# Altium PCB COMS.PcbDoc
Units mm, origin at the board's own origin, x right, y up, seen from the top; angles counter-clockwise.
Board outline 75 x 57.5 mm, 2 copper layers (Top Layer, Bottom Layer); 50 components, 32 nets, 157 pads, 41 vias.
Unrouted connection lines stored in the file: 1.
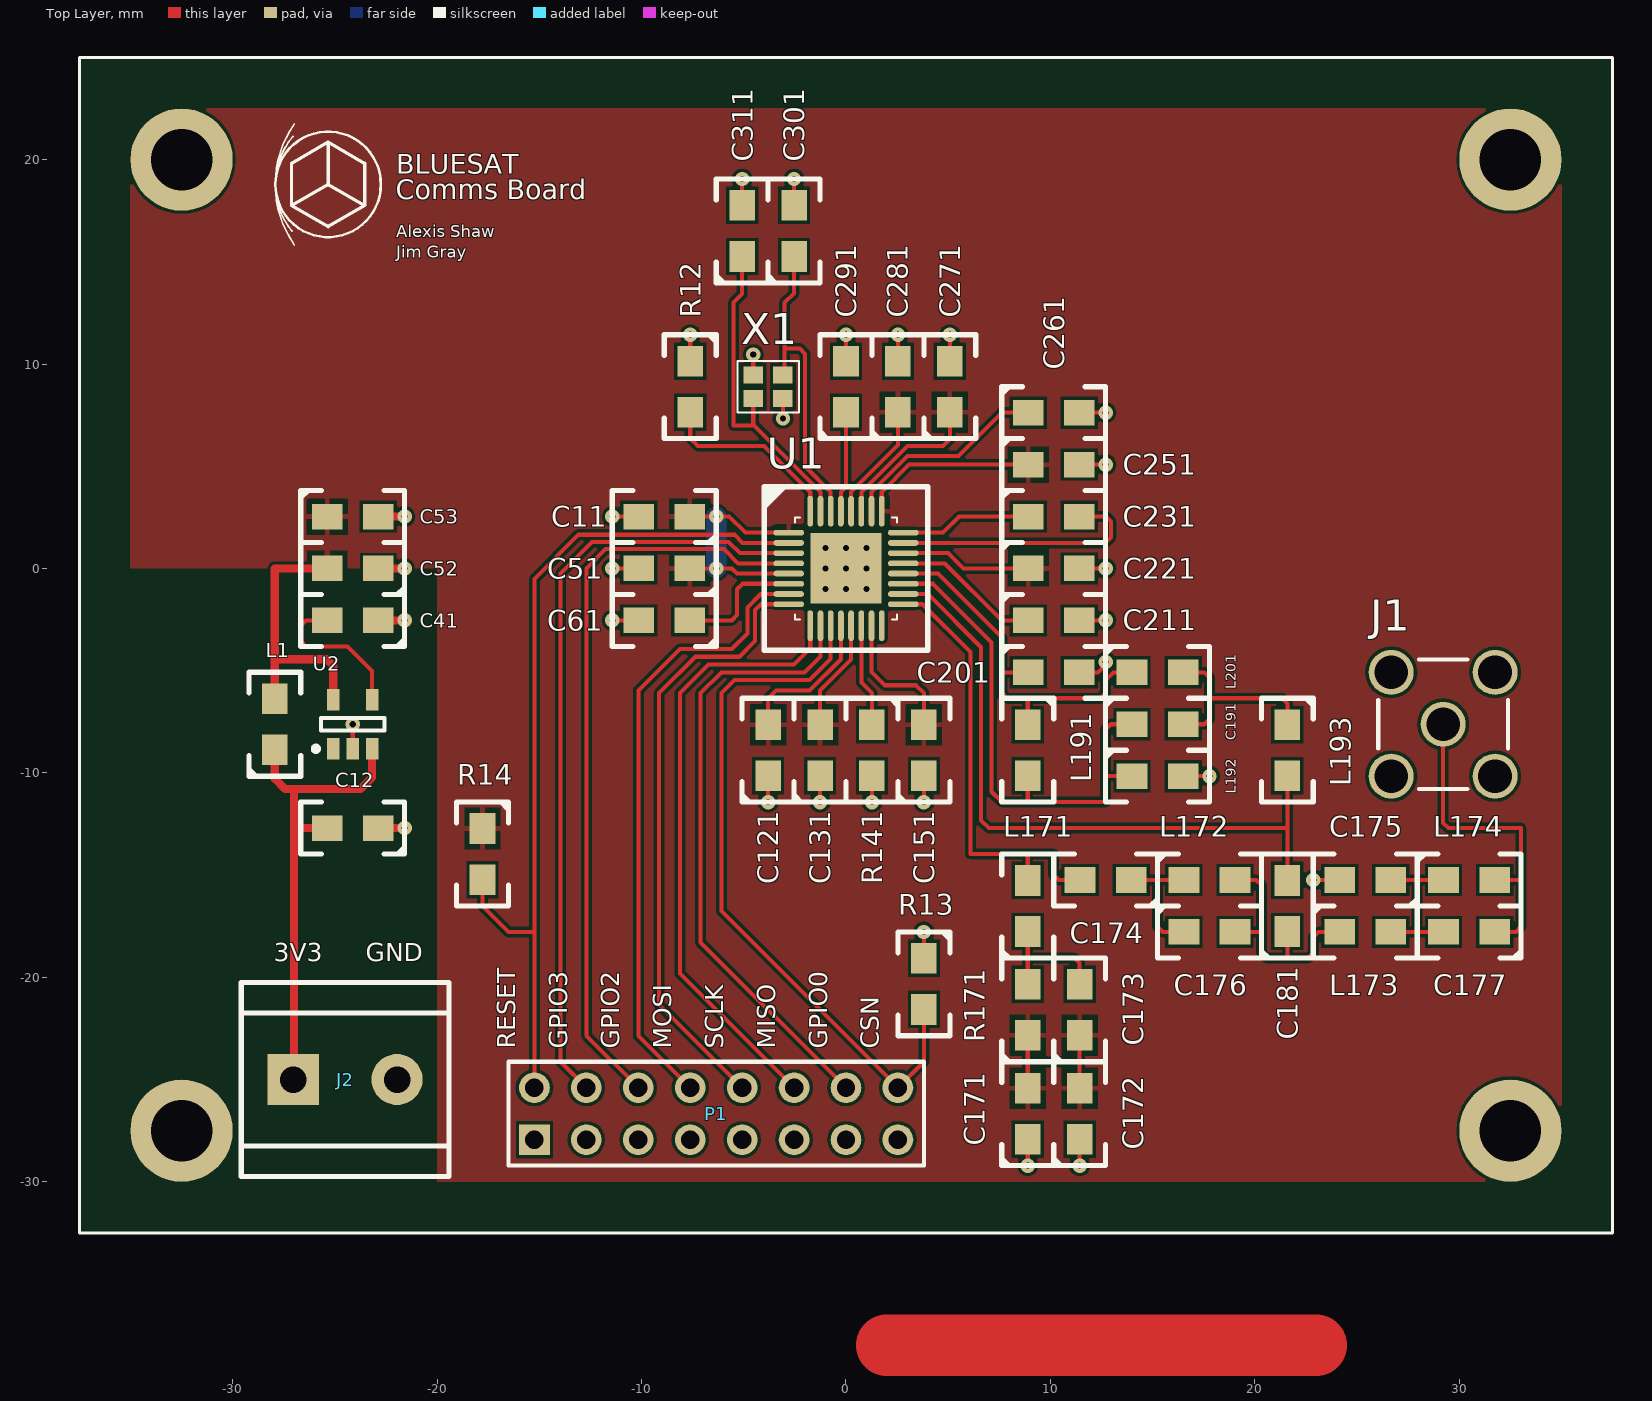
[diagram p0: Top Layer view]
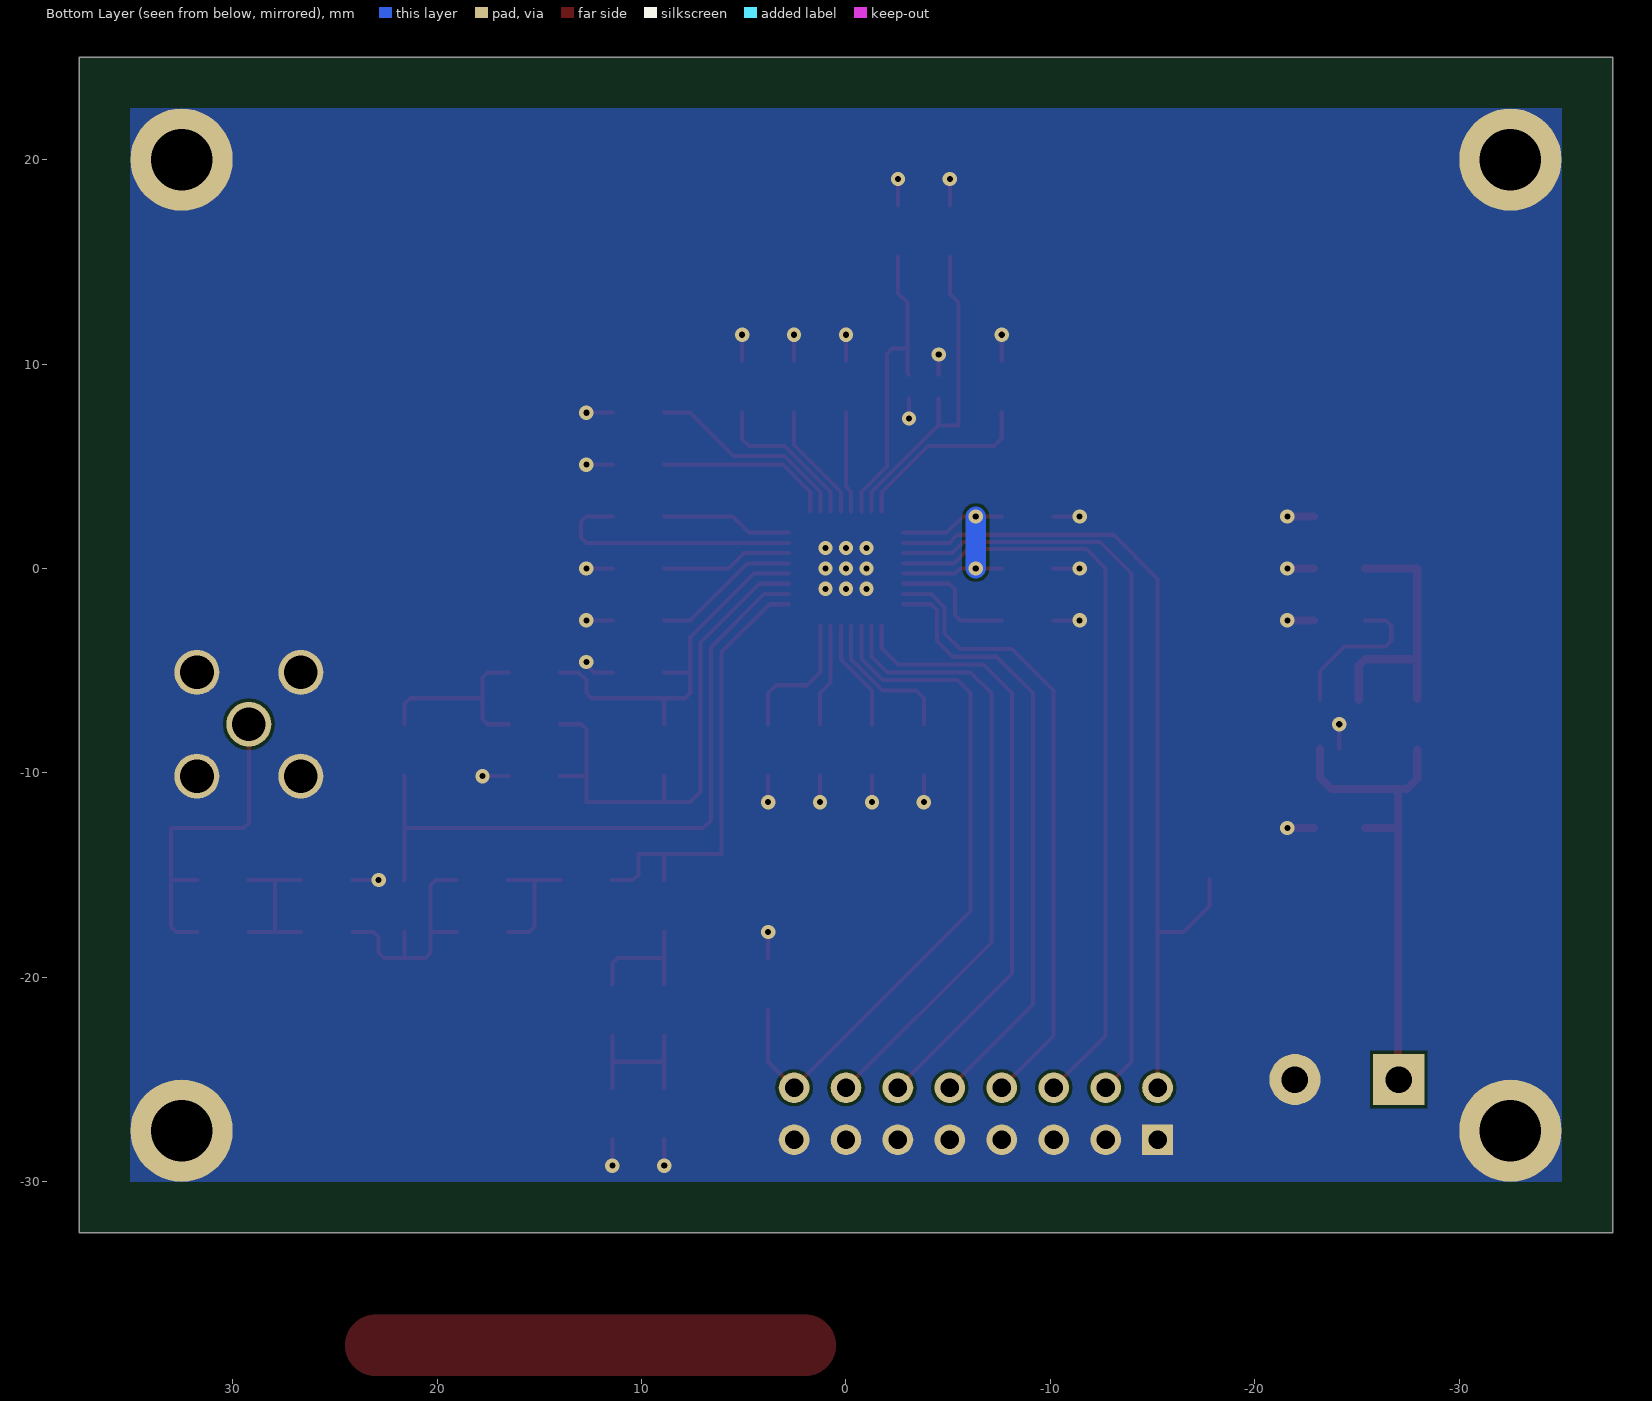
[diagram p1: Bottom Layer view, seen from below]

## Layer stack, top to bottom
Top Solder: solder mask 0.0102, Solder Resist, Dk 3.5
Top Layer: signal copper 0.0356
Dielectric 1: dielectric 0.32, FR-4, Dk 4.8
Bottom Layer: signal copper 0.0356
Bottom Solder: solder mask 0.0102, Solder Resist, Dk 3.5

## Board outline
-37.5,-32.5 -37.5,25 37.5,25 37.5,-32.5

## Design rules (kind name [scope] priority, off if disabled: settings)
Clearance Clearance_1 [All] p1: gap=0.152
Clearance [(IsRegion AND InNet('VDD_REG')) vs InNet('GND')] p2: gap=0.4
PolygonConnect PolygonConnect_1 [InNet('GND') vs InNet('GND')] p1: connectstyle=Direct reliefconductorwidth=0.254 reliefentries=4 polygonreliefangle="90 Angle" airgapwidth=0.254
PolygonConnect [All] p2: connectstyle=Relief reliefconductorwidth=0.254 reliefentries=4 polygonreliefangle="90 Angle" airgapwidth=0.254
RoutingVias [All] p1: holewidth=0.711 width=1.27 viastyle="Through Hole" minholewidth=0.3 minwidth=0.7 maxholewidth=0.711 maxwidth=1.27
SolderMaskExpansion [All] p1: expansion=0.05
UnpouredPolygon [All] p1: allowunpoured=FALSE
Width [All] p1: maxlimit=3 minlimit=0.152 preferedwidth=0.254
29 further rules are at their usual default settings.

## Components (designator, comment, footprint, x,y, rotation, side; value= is the part's Value field where it differs from the comment)
C11 "0805 Cap" "0805 Cap" -8.89,2.54 r0 top
C12 "0805 Cap" "0805 Cap" -24.13,-12.7 r0 top
C41 "0805 Cap" "0805 Cap" -24.13,-2.54 r0 top
C51 "0805 Cap" "0805 Cap" -8.89,0 r0 top
C52 "0805 Cap" "0805 Cap" -24.13,0 r0 top
C53 "DNM" "0805 Cap" -24.13,2.54 r180 top
C61 "0805 Cap" "0805 Cap" -8.89,-2.54 r0 top
C121 "0805 Cap" "0805 Cap" -3.81,-8.89 r270 top
C131 "0805 Cap" "0805 Cap" -1.27,-8.89 r270 top
C151 "0805 Cap" "0805 Cap" 3.81,-8.89 r270 top
C171 "0805 Cap" "0805 Cap" 8.89,-26.67 r270 top
C172 "DNM" "0805 Cap" 11.43,-26.67 r270 top
C173 "DNM" "0805 Cap" 11.43,-21.59 r270 top
C174 "0805 Cap" "0805 Cap" 12.7,-15.24 r0 top
C175 "0805 Cap" "0805 Cap" 25.4,-15.24 r0 top
C176 "0805 Cap" "0805 Cap" 17.78,-17.78 r180 top
C177 "DNM" "0805 Cap" 30.48,-17.78 r0 top
C181 "0805 Cap" "0805 Cap" 21.59,-16.51 r270 top
C191 "0805 Cap" "0805 Cap" 15.24,-7.62 r180 top
C201 "0805 Cap" "0805 Cap" 10.16,-5.08 r180 top
C211 "0805 Cap" "0805 Cap" 10.16,-2.54 r180 top
C221 "0805 Cap" "0805 Cap" 10.16,0 r180 top
C231 "0805 Cap" "0805 Cap" 10.16,2.54 r180 top
C251 "0805 Cap" "0805 Cap" 10.16,5.08 r180 top
C261 "0805 Cap" "0805 Cap" 10.16,7.62 r180 top
C271 "0805 Cap" "0805 Cap" 5.08,8.89 r270 top
C281 "0805 Cap" "0805 Cap" 2.54,8.89 r270 top
C291 "0805 Cap" "0805 Cap" 0,8.89 r270 top
C301 "0805 Cap" "0805 Cap" -2.54,16.51 r270 top
C311 "0805 Cap" "0805 Cap" -5.08,16.51 r270 top
J1 "32K101-400L5" ROS-32K101-400L5_V 29.21,-7.62 r0 top
J2 "2 Pin terminal Block" "5.05mm Terminal Block - 2" -24.5,-25 r0 top
L1 "" "0805 Resistor" -27.94,-7.62 r270 top
L171 "Inductor" "0805 Resistor" 8.89,-16.51 r270 top
L172 "Inductor" "0805 Resistor" 17.78,-15.24 r180 top
L173 "Inductor" "0805 Resistor" 25.4,-17.78 r180 top
L174 "Inductor" "0805 Resistor" 30.48,-15.24 r180 top
L191 "Inductor" "0805 Resistor" 8.89,-8.89 r90 top
L192 "Inductor" "0805 Resistor" 15.24,-10.16 r180 top
L193 "Inductor" "0805 Resistor" 21.59,-8.89 r90 top
L201 "Inductor" "0805 Resistor" 15.24,-5.08 r180 top
P1 "Header 8X2A" HDR2X8_CEN -15.24,-27.94 r0 top
R12 "0805 Resistor" "0805 Resistor" -7.62,8.89 r90 top
R13 "0805 Resistor" "0805 Resistor" 3.81,-20.32 r90 top
R14 "0805 Resistor" "0805 Resistor" -17.78,-13.97 r90 top
R141 "0805 Resistor" "0805 Resistor" 1.27,-8.89 r90 top
R171 "0805 Resistor" "0805 Resistor" 8.89,-21.59 r270 top
U1 "CC1120" TI-RHB 0,0 r90 top
U2 "TPS79930DDCT" TI-DDC5_N -24.13,-7.62 r90 top
X1 "FA128 30MHz" FA128 -3.81,8.89 r0 top

## Footprints (in the part's own frame and the unit in brackets; to place one, negate y for a bottom-side part, rotate by r counter-clockwise, add the part's x,y. Pads: shape width x height; smd on the part's side, far side on the other; paste and mask are expansions set on the pad)
"5.05mm Terminal Block - 2" [mm]
  rect 2.5x2.5 hole 1.3: 1(-2.54,0)
  round 2.5 hole 1.3: 2(2.54,0)
  silkscreen extent -5.08,-4.75 5.08,4.75
"0805 Cap" [mm]
  rect 1.5x1.25 smd: 1(1.25,0) 2(-1.25,0)
  silkscreen extent -2.54,-1.27 2.54,1.27, body extent -1,-0.63 1.1,0.63, height 0.9
"0805 Resistor" [mm] "0805 Resistor"
  rect 1.5x1.25 smd: 1(1.25,0) 2(-1.25,0)
  silkscreen extent -2.54,-1.27 2.54,1.27, body extent -1,-0.63 1.1,0.63, height 0.6
FA128 [mm]
  rect 0.95x0.85 smd mask+0.07: 1(-0.725,-0.575) 2(0.725,-0.575) 3(0.725,0.575) 4(-0.725,0.575)
  silkscreen extent -1.5,-1.25 1.5,1.25, body extent -1,-0.8 1,0.8, height 0.5
HDR2X8_CEN [mm] "Connector; Header; 8x2 Position"
  rect 1.5x1.5 hole 0.9: 1(0,0)
  round 1.5 hole 0.9: 2(2.54,0) 3(5.08,0) 4(7.62,0) 5(10.16,0) 6(12.7,0) 7(15.24,0) 8(17.78,0) 9(0,2.54) 10(2.54,2.54) 11(5.08,2.54) 12(7.62,2.54) 13(10.16,2.54) 14(12.7,2.54) 15(15.24,2.54) 16(17.78,2.54)
  silkscreen extent -1.27,-1.27 19.05,3.81
ROS-32K101-400L5_V [mm] "SMA Straight Jack, 6.35x6.35x9.5mm, Rosenberger Recommended"
  round 2.2 hole 1.65: 1(0,0) MH(-2.54,-2.54) MH(-2.54,2.54) MH(2.54,-2.54) MH(2.54,2.54)
  silkscreen extent -3.17,-3.18 3.18,3.17, body extent -3.17,-3.17 3.18,3.18, height 9.5
TI-DDC5_N [mm] "SOT23, 5-Leads, Body 2.9x1.6mm, Pitch 0.95mm, IPC Medium Density"
  rect 1.05x0.6 smd: 1(-1.2,0.95) 2(-1.2,0) 3(-1.2,-0.95) 4(1.2,-0.95) 5(1.2,0.95)
  silkscreen extent -1.32,-1.55 0.3,1.92, body extent -0.87,-1.52 0.87,1.53, height 1.1
TI-RHB [mm] "S_PVQFN-N32"
  rect 3.45x3.45 smd: 0(0,0)
  oval 0.28x1.5 smd mask+0.07: 1(1.75,2.8) 2(1.25,2.8) 3(0.75,2.8) 4(0.25,2.8) 5(-0.25,2.8) 6(-0.75,2.8) 7(-1.25,2.8) 8(-1.75,2.8) 17(-1.75,-2.8) 18(-1.25,-2.8) 19(-0.75,-2.8) 20(-0.25,-2.8) 21(0.25,-2.8) 22(0.75,-2.8) 23(1.25,-2.8) 24(1.75,-2.8)
  oval 1.5x0.28 smd mask+0.07: 9(-2.8,1.75) 10(-2.8,1.25) 11(-2.8,0.75) 12(-2.8,0.25) 13(-2.8,-0.25) 14(-2.8,-0.75) 15(-2.8,-1.25) 16(-2.8,-1.75) 25(2.8,-1.75) 26(2.8,-1.25) 27(2.8,-0.75) 28(2.8,-0.25) 29(2.8,0.25) 30(2.8,0.75) 31(2.8,1.25) 32(2.8,1.75)
  silkscreen extent -4,-4 4,4, body extent -2.5,-2.5 2.5,2.5, height 1

## Part data
C11 C51 C53 C61 C121 C131 C151 C177 C211 C221 C251 C261 C271 C281 C291: library part "0805 MLCC - X7R, 10%", "0805 MLCC - X7R, 10%"
C12 C41 C52 C171 C172 C173 C174 C175 C176 C181 C191 C201 C301 C311: library part "0805 MLCC - NP0, 5%", "0805 MLCC - NP0, 5%"
C231: library part "0805 MLCC - NP0, 5%", "0805 MLCC - U2J, 5%"
J1: "SMA Straight Jack, Up to 18 GHz, -55 to 155 degC"
J2: library part "2 Terminal Block"
L1: library part Inductor, "digikey: 490-1041-1-ND"
P1: "Header, 8-Pin, Dual row"
R12 R13 R14 R141 R171: library part "0805 Thick Film Resistor 1%", "0805 Thick Film Resistor 1%"
U1: "Digi-Key Part Number 296-35667-1-ND"
U2: "Single Output High PSRR LDO, 200 mA, Fixed 3 V Output, 2.7 to 6.5 V Input, with Low IQ, 5-pin SOT (DDC), -40 to 85 degC, Green (RoHS & no Sb/Br)"
X1: library part "4-Pin Oscillator"

## Free pads (board coordinates)
  round 5 hole 3 mask+0.07: 0(-32.5,20) 1(-32.5,-27.5) 2(32.5,-27.5) 3(32.5,20)

## Via types
v1: diameter 0.7, hole 0.3, Top Layer to Bottom Layer, tented both sides, 22 vias
v2: diameter 0.7, hole 0.3, Top Layer to Bottom Layer, 18 vias
v3: diameter 0.7/0.7 (per signal layer), hole 0.3, Top Layer to Bottom Layer, tented both sides, 1 vias

## Nets (pads, with @x,y where several pads share a name; then routed paths per layer and width w, separated by ;. In a path a pad name is that pad's centre, name@x,y a point inside that pad or via, vN(x,y) a via of type N, cw(c..) or ccw(c..) an arc to the next point about the centre after c; other vN are vias at no path point)
3V3A: C12.2 J2.1 L1.1 U2.1 U2.3 | length 24.1
  Top Layer w0.4: L1.1 -27.94,-10.287 -27.432,-10.795 -27,-10.795 ; J2.1@-27.54,-25 -27,-24.46 -27,-12.7 ; C12.2 -27,-12.7 ; U2.3 -23.18,-10.226 -23.749,-10.795 -27,-10.795 ; -27,-12.7 -27,-10.795
CSN: P1.16 R13.2 U1.11 | length 34.9
  Top Layer w0.2: U1.11 -0.75,-4.433 -1.778,-5.461 -5.461,-5.461 -6.096,-6.096 -6.096,-16.764 P1.16 3.81,-24.13 R13.2
GND: C11.2 C12.1 C41.1 C51.2 C52.1 C53.2 C61.2 C121.1 C131.1 C151.1 C171.1 C172.1 C175.2 C201.2 C211.2 C221.2 C251.2 C261.2 C271.2 C281.2 C291.2 C301.2 C311.2 J1.MH J2.2 L192.2 P1.1 P1.2 P1.3 P1.4 P1.5 P1.6 P1.7 P1.8 pad.0 pad.1 pad.2 pad.3 R12.1 R13.1 R141.2 U1.0 U2.2 X1.2 X1.4 | length 38.3
  Top Layer w0.2: U2.2 v2(-24.13,-7.62) ; v1(-11.43,-2.54) C61.2 ; v1(-11.43,0) C51.2 ; v1(-11.43,2.54) C11.2 ; R12.1 v1(-7.62,11.43) ; C311.2 v1(-5.08,19.05) ; X1.4 v1(-4.535,10.465) ; v1(-3.81,-11.43) C121.1 ; v1(-3.085,7.335) X1.2 ; C301.2 v1(-2.54,19.05) ; v1(-1.27,-11.43) C131.1 ; C291.2 v1(0,11.43) ; v1(1.27,-11.43) R141.2 ; C281.2 v1(2.54,11.43) ; R13.1 v2(3.81,-17.78) ; v1(3.81,-11.43) C151.1 ; C271.2 v1(5.08,11.43) ; v1(8.89,-29.21) C171.1 ; C201.2 12.319,-5.08 12.7,-4.699 v3(12.7,-4.572) ; C211.2 v1(12.7,-2.54) ; C221.2 v1(12.7,0) ; C251.2 v1(12.7,5.08) ; C261.2 v1(12.7,7.62) ; v1(11.43,-29.21) C172.1 ; L192.2 v2(17.78,-10.16) ; v1(22.86,-15.24) C175.2
  Top Layer w0.4: C12.1 v2(-21.59,-12.7) ; C41.1 v2(-21.59,-2.54) ; C52.1 v2(-21.59,0) ; C53.2 v2(-21.59,2.54)
  other v2: -1,-1 0,-1 1,-1 -1,0 0,0 1,0 -1,1 0,1 1,1
GPIO0: P1.15 U1.10 | length 30.4
  Top Layer w0.2: U1.10 -1.25,-4.298 -2.032,-5.08 -6.096,-5.08 -7.112,-6.096 -7.112,-18.288 P1.15
GPIO2: P1.11 U1.4 | length 37
  Top Layer w0.2: P1.11 -12.7,-22.86 -12.7,0 -11.754,0.946 -5.969,0.946 -5.273,0.25 U1.4
GPIO3: P1.10 U1.3 | length 37.7
  Top Layer w0.2: P1.10 -13.97,-24.13 -13.97,-0.254 -12.417,1.299 -5.744,1.299 -5.195,0.75 U1.3
MISO: P1.14 U1.9 | length 30
  Top Layer w0.2: P1.14 -8.128,-19.812 -8.128,-6.096 -6.731,-4.699 -2.54,-4.699 -1.75,-3.909 U1.9
MOSI: P1.12 U1.7 | length 30.5
  Top Layer w0.2: P1.12 -10.16,-22.86 -10.16,-5.969 -8.128,-3.937 -5.588,-3.937 -4.826,-3.175 -4.826,-1.905 -4.171,-1.25 U1.7
NetC41_2: C41.2 U2.4 | length 7.7
  Top Layer w0.2: C41.2 -26.416,-2.54 -26.67,-2.794 -26.67,-3.556 -26.416,-3.81 -24.384,-3.81 -23.18,-5.014 U2.4
NetC61_1: C61.1 U1.6 | length 6.3
  Top Layer w0.2: C61.1 -5.588,-2.54 -5.334,-2.286 -5.334,-1.016 -5.068,-0.75 U1.6
NetC173_2: C173.2 L171.1 R171.2 | length 6.3
  Top Layer w0.2: R171.2 8.89,-19.05 ; L171.1 8.89,-19.05 ; C173.2 11.43,-19.304 11.176,-19.05 8.89,-19.05
NetC174_1: C174.1 C176.1 L172.1 | length 6.3
  Top Layer w0.2: C174.1 15.24,-15.24 ; C176.1 15.494,-17.78 15.24,-17.526 15.24,-15.24 ; L172.1 15.24,-15.24
NetC174_2: C174.2 L171.2 U1.17 | length 21.9
  Top Layer w0.2: U1.17 3.75,-1.75 6.096,-4.096 6.096,-13.97 8.89,-13.97 ; L171.2 8.89,-13.97 ; C174.2 10.414,-15.24 10.16,-14.986 10.16,-13.97 8.89,-13.97
NetC175_1: C175.1 C177.2 L173.2 L174.1 | length 7.7
  Top Layer w0.2: L173.2 27.94,-17.78 ; C175.1 27.94,-15.24 ; C177.2 27.94,-17.78 ; L174.1 27.94,-15.24 ; 27.94,-17.78 27.94,-15.24
NetC176_2: C176.2 C181.1 L172.2 L173.1 | length 12.2
  Top Layer w0.2: C176.2 20.32,-17.78 ; L172.2 20.066,-15.24 20.32,-15.494 20.32,-17.78 ; C181.1 21.59,-19.05 ; L173.1 23.114,-17.78 22.86,-18.034 22.86,-18.796 22.606,-19.05 21.59,-19.05 ; 20.32,-17.78 20.32,-18.796 20.574,-19.05 21.59,-19.05
NetC177_1: C177.1 J1.1 L174.2 | length 16.3
  Top Layer w0.2: J1.1 29.21,-12.446 29.464,-12.7 33.02,-12.7 33.02,-15.24 ; C177.1 32.766,-17.78 33.02,-17.526 33.02,-15.24 ; L174.2 33.02,-15.24
NetC181_2: C181.2 L193.2 U1.18 | length 33.6
  Top Layer w0.2: U1.18 4,-1.25 6.604,-3.854 6.604,-12.319 6.985,-12.7 21.59,-12.7 ; C181.2 21.59,-12.7 ; L193.2 21.59,-12.7
NetC191_1: C191.1 L191.2 L192.1 U1.19 | length 26.1
  Top Layer w0.2: U1.19 4.25,-0.75 7.112,-3.612 7.112,-10.922 7.62,-11.43 8.89,-11.43 ; L191.2 8.89,-11.43 ; 12.7,-10.16 L192.1 ; C191.1 12.954,-7.62 12.7,-7.874 12.7,-11.43 8.89,-11.43
NetC191_2: C191.2 L193.1 L201.2 | length 9.8
  Top Layer w0.2: C191.2 17.526,-7.62 17.78,-7.366 17.78,-6.35 ; L201.2 17.526,-5.08 17.78,-5.334 17.78,-6.35 ; L193.1 21.59,-6.604 21.336,-6.35 17.78,-6.35
NetC201_1: C201.1 L191.1 L201.1 U1.20 | length 18.8
  Top Layer w0.2: U1.20 4.5,-0.25 7.62,-3.37 7.62,-5.08 ; L191.1 8.89,-6.35 ; C201.1 7.62,-5.08 ; L201.1 13.081,-5.08 12.7,-5.461 12.7,-6.096 12.446,-6.35 8.89,-6.35 ; 7.62,-5.08 7.62,-6.096 7.874,-6.35 8.89,-6.35
NetC211_1: C211.1 U1.21 | length 7.3
  Top Layer w0.2: U1.21 4.83,0.25 7.62,-2.54 C211.1
NetC231_1: C231.1 U1.24 | length 6.4
  Top Layer w0.2: U1.24 4.75,1.75 5.54,2.54 C231.1
NetC231_2: C231.2 U1.23 | length 12.7
  Top Layer w0.2: U1.23 12.68,1.25 12.954,1.524 12.954,2.296 12.71,2.54 C231.2
NetC261_1: C261.1 U1.26 | length 10.2
  Top Layer w0.2: U1.26 1.25,3.75 3,5.5 5.5,5.5 7.62,7.62 C261.1
NetC291_1: C291.1 U1.29 | length 4.9
  Top Layer w0.2: U1.29 -0.25,3.75 0,4 C291.1
NetC301_1: C301.1 U1.30 X1.3 | length 15.3
  Top Layer w0.2: X1.3 -3,9.55 -3,10.75 ; C301.1 -2.54,13.46 -3,13 -3,10.75 ; U1.30 -0.75,3.75 -2,5 -2,10.5 -2.25,10.75 -3,10.75
NetC311_1: C311.1 U1.31 X1.1 | length 16.3
  Top Layer w0.2: C311.1 -5.08,13.42 -5.5,13 -5.5,7 -4.535,7 ; X1.1 -4.535,7 ; U1.31 -1.25,3.75 -4.5,7 -4.535,7
NetR12_2: R12.2 U1.32 | length 9.2
  Top Layer w0.2: R12.2 -7.62,6.37 -7.25,6 -4,6 -1.75,3.75 U1.32
NetR141_1: R141.1 U1.14 | length 5.1
  Top Layer w0.2: U1.14 0.75,-5.576 1.27,-6.096 R141.1
RESET_N: P1.9 R14.2 U1.2 | length 42.7
  Top Layer w0.2: R14.2 -17.78,-16.51 -16.51,-17.78 -15.24,-17.78 ; P1.9 -15.24,-17.78 ; U1.2 -5.06,1.25 -5.461,1.651 -13.081,1.651 -15.24,-0.508 -15.24,-17.78
SCLK: P1.13 U1.8 | length 30
  Top Layer w0.2: P1.13 -9.144,-21.336 -9.144,-6.096 -7.366,-4.318 -5.207,-4.318 -4.445,-3.556 -4.445,-2.032 -4.163,-1.75 U1.8
VDD_REG: C11.1 C51.1 C52.2 C53.1 C121.2 C131.2 C151.2 C171.2 C172.2 C173.1 C221.1 C251.1 C271.1 C281.1 L1.2 R14.1 R171.1 U1.1 U1.5 U1.12 U1.13 U1.15 U1.22 U1.25 U1.27 U1.28 U2.5 | length 82
  Top Layer w0.2: C51.1 v2(-6.35,0) -5.588,0 -5.338,-0.25 U1.5 ; C11.1 v2(-6.35,2.54) -5.715,2.54 -4.925,1.75 U1.1 ; C121.2 -3.81,-6.35 -3.429,-5.969 -1.778,-5.969 -0.25,-4.441 U1.12 ; C131.2 -1.27,-5.969 0.25,-4.449 U1.13 ; U1.28 0.25,3.75 2.54,6.04 C281.1 ; U1.27 0.75,3.75 3,6 4.75,6 5.08,6.33 C271.1 ; U1.15 1.25,-5.06 1.905,-5.715 3.429,-5.715 3.81,-6.096 C151.2 ; U1.25 1.75,3.75 3.08,5.08 C251.1 ; U1.22 5,0.75 5.75,0 C221.1 ; C171.2 8.89,-24.13 ; R171.1 8.89,-24.13 ; C172.2 11.43,-24.13 ; C173.1 11.43,-24.13 ; 8.89,-24.13 11.43,-24.13
  Top Layer w0.4: L1.2 -27.94,-4.445 ; C52.2 -27.94,0 -27.94,-4.445 ; U2.5 -25.08,-4.765 -25.4,-4.445 -27.94,-4.445
  Bottom Layer w1: v2(-6.35,0) v2(-6.35,2.54)
pads on no net: U1.16
copper on no net: | length 21
  Top Layer w3: 2,-38 23,-38

## Polygon pours and split planes (outlines as drawn)
VDD_REG on Top Layer "Top Layer-No Net" (solid, pour order 2): 35,-30 35,22.5 -35,22.5 -35,5 -35,0 -25,0 -20,0 -20,-30
GND on Bottom Layer "Top Layer-No Net" (solid, pour order 4): -35,-30 -35,22.5 35,22.5 35,-30

## Silkscreen, mask and mechanical layers (free items; w line width, h text height)
Top Overlay:
  circle w0.124: c-25.335,18.786 r2.581
  lines w0.083: -27.104,16.504 cw(c-24.303,18.786) -27.054,21.129 ; -26.983,15.826 cw(c-22.755,18.786) -26.983,21.747
  lines w0.15: -37.5,-32.5 37.5,-32.5 37.5,25 -37.5,25 -37.5,-32.5
  lines w0.165: -27.124,17.754 -25.335,18.786 ; -27.124,17.754 -27.124,19.819 -25.335,20.851 ; -27.124,17.754 -25.335,16.722 -23.547,17.754 ; -25.335,18.786 -25.335,20.851 ; -25.335,18.786 -23.547,17.754 ; -25.335,20.851 -23.547,19.819 -23.547,17.754
  text "BLUESAT" at -22,19 h1.65
  text "Comms Board" at -22.032,17.754 h1.65
  text "Alexis Shaw" at -22,16 h1
  text "Jim Gray" at -22,15 h1
  text "3V3" at -28,-19.5 h1.52
  text "GND" at -23.5,-19.5 h1.52
  text "RESET" at -15.875,-23.495 h1.52 r90
  text "GPIO3" at -13.335,-23.495 h1.52 r90
  text "GPIO2" at -10.795,-23.495 h1.52 r90
  text "MOSI" at -8.255,-23.495 h1.52 r90
  text "SCLK" at -5.715,-23.495 h1.52 r90
  text "MISO" at -3.175,-23.495 h1.52 r90
  text "GPIO0" at -0.635,-23.495 h1.52 r90
  text "CSN" at 1.905,-23.495 h1.52 r90
Mechanical 1:
  the board outline again, w0.1